# Altium PCB SolderingStation_V6.PcbDoc (part 1 of 2)
Units mm, origin at the board's own origin, x right, y up, seen from the top; angles counter-clockwise.
Board outline 138.15 x 60.81 mm, 2 copper layers (Top Layer, Bottom Layer), stack 1.671 mm thick; 179 components, 105 nets, 526 pads, 400 vias.
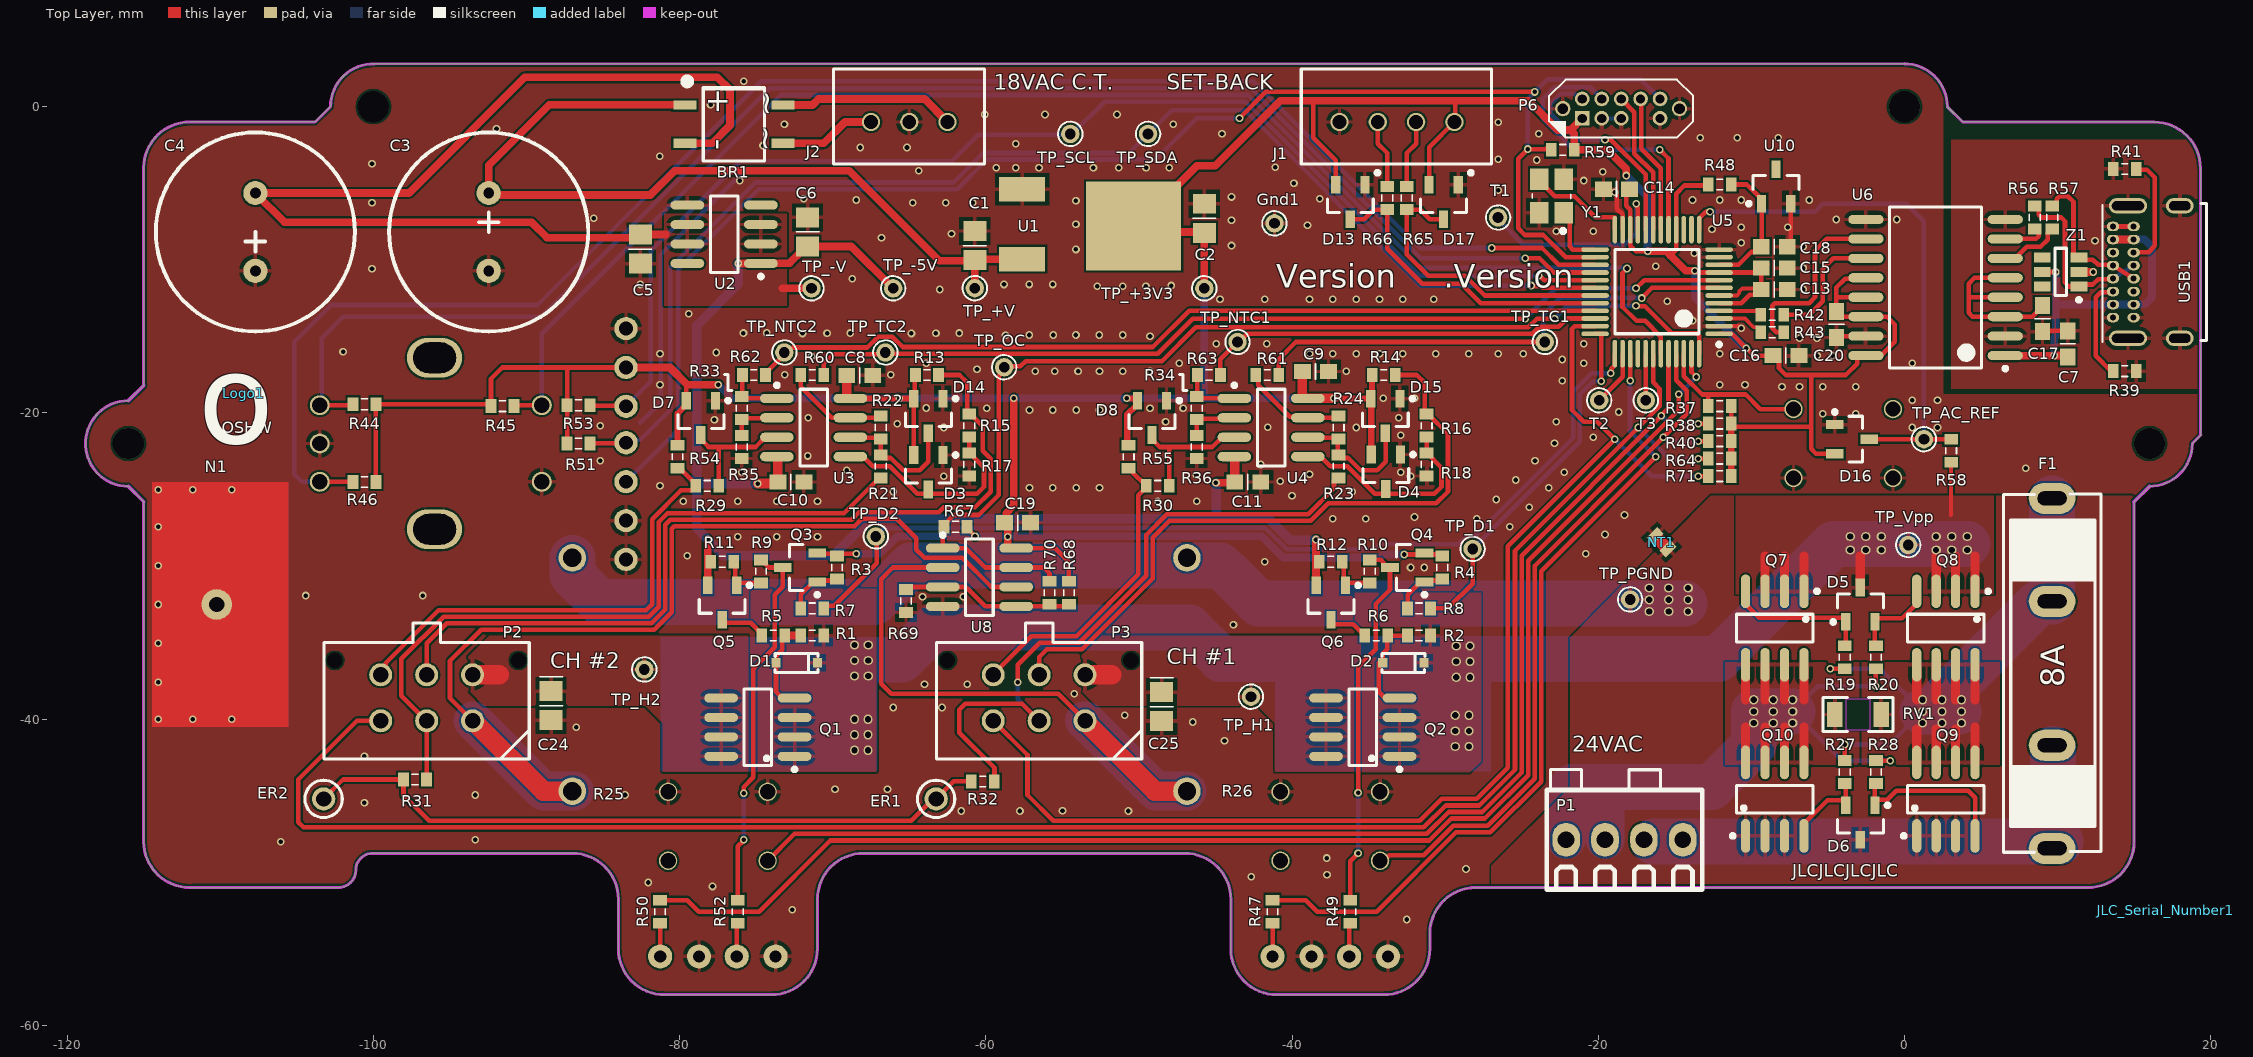
[diagram p0: Top Layer view]
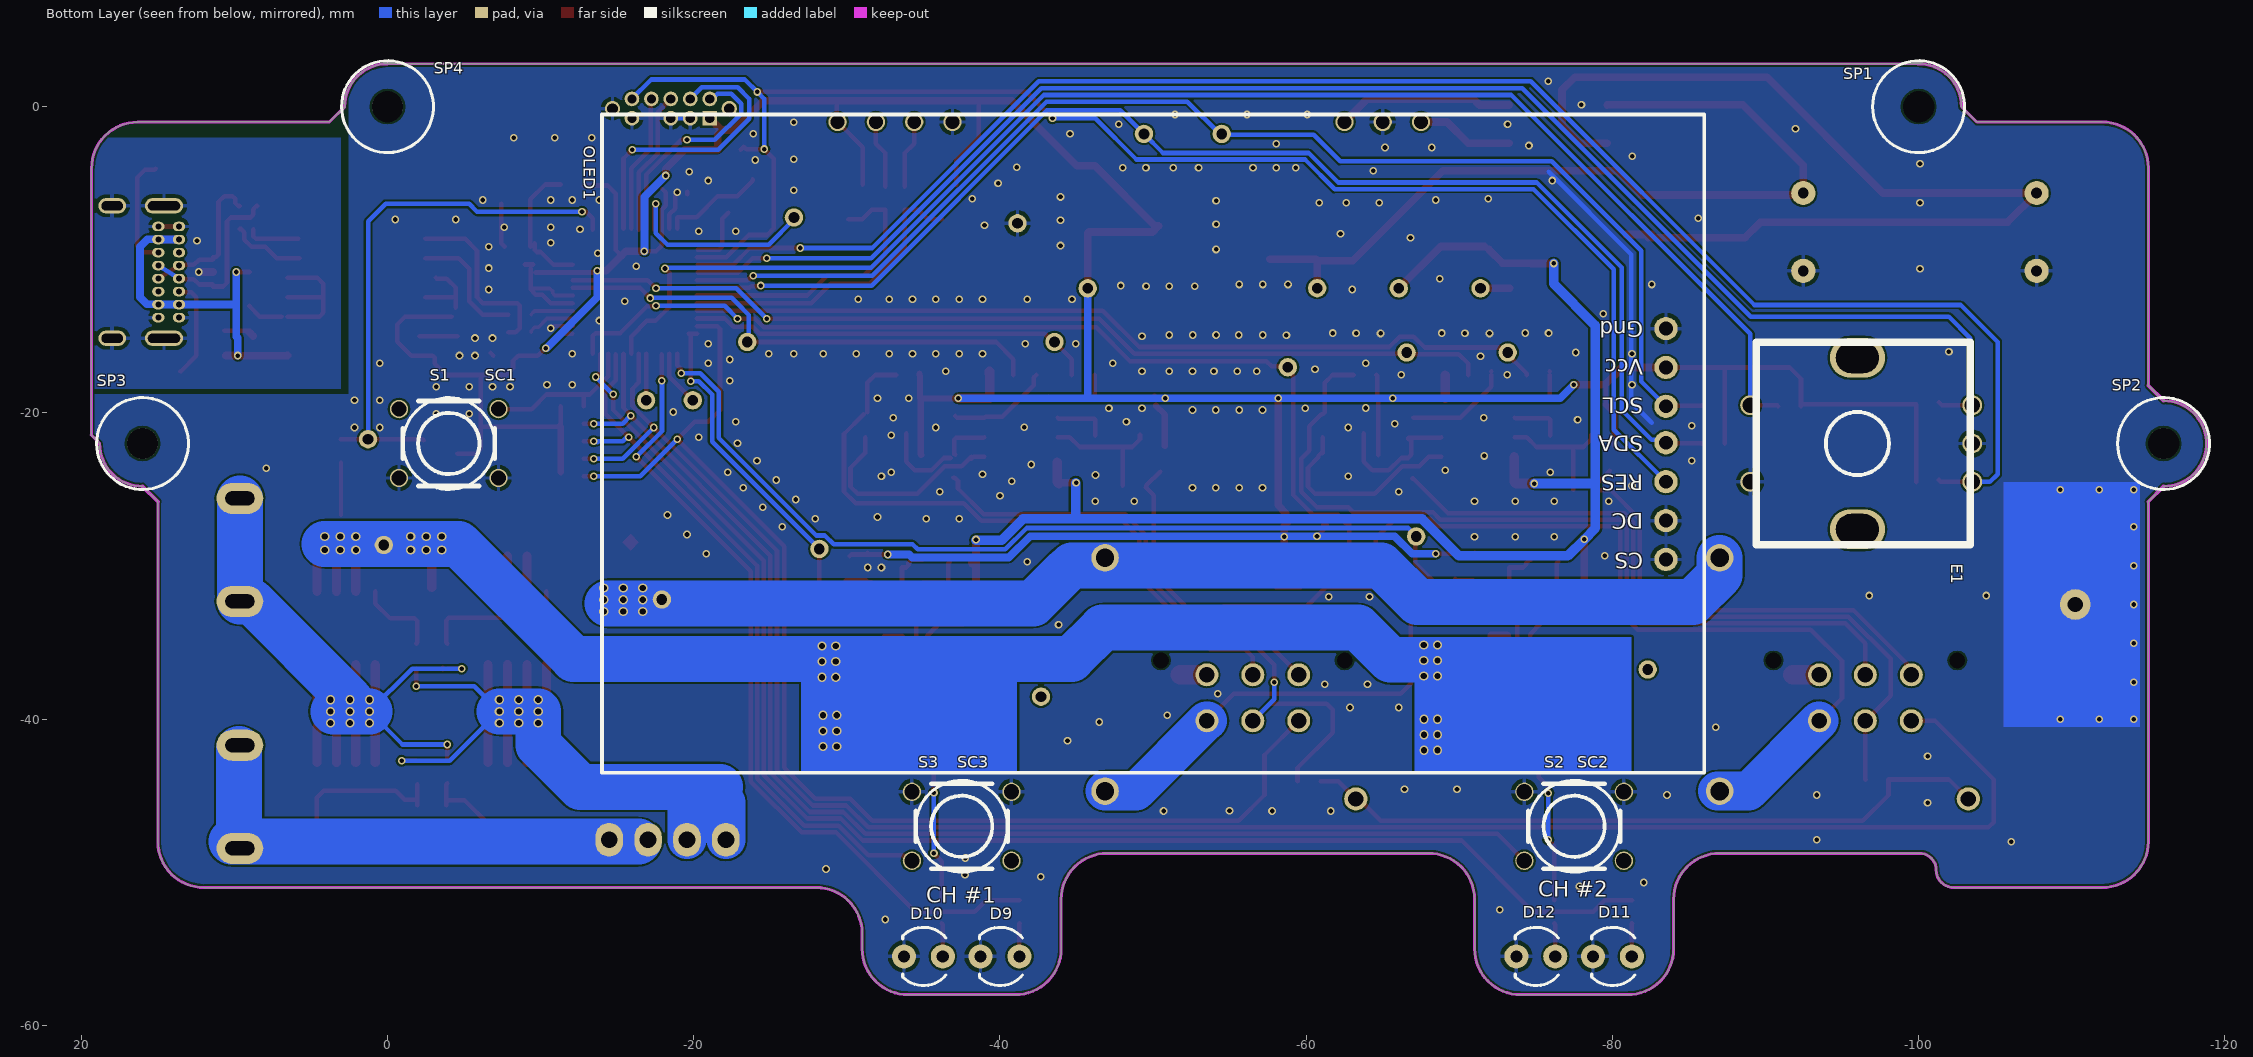
[diagram p1: Bottom Layer view, seen from below]

## Layer stack, top to bottom
Top Solder: solder mask 0.0102, Solder Resist, Dk 3.5
Top Layer: signal copper 0.0356
Dielectric 1: dielectric 1.6, FR-4, Dk 4.8
Bottom Layer: signal copper 0.0356
Bottom Solder: solder mask 0.0102, Solder Resist, Dk 3.5

## Board outline
-112,-51 -102.286,-51 ccw(c-102.286,-49.862) -101.148,-49.862 cw(c-100.048,-49.862) -100.048,-48.762 -100.048,-48.765 -87,-48.765 cw(c-87,-51.765) -84,-51.765 -84,-55 ccw(c-81,-55) -81,-58 -74,-58 ccw(c-74,-55) -71,-55 -71,-51.765 cw(c-68,-51.765) -68,-48.765 -47,-48.765 cw(c-47,-51.765) -44,-51.765 -44,-55 ccw(c-41,-55) -41,-58 -34,-58 ccw(c-34,-55) -31,-55 -31,-54 cw(c-28,-54) -28,-51 12,-51 ccw(c12,-48) 15,-48 15,-25.8 16,-24.8 ccw(c16,-22) 18.8,-22 19.355,-21.445 19.34,-21.445 19.34,-4.013 19.329,-4.013 ccw(c16.329,-4.013) 16.329,-1.013 16.329,-1 3.8,-1 2.8,0 ccw(c0,0) 0,2.8 0,2.814 -99.926,2.799 ccw(c-100,0) -102.8,0 -103.8,-1 -112,-1 ccw(c-112,-4) -115,-4 -115,-18.2 -116,-19.2 ccw(c-116,-22) -116,-24.8 -115,-25.8 -115,-48 ccw(c-112,-48)

## Design rules (kind name [scope] priority, off if disabled: settings)
Clearance [All] p1: gap=0.127 ignorepadtopadclearanceinfootprint=FALSE
DiffPairsRouting [All] p1: maxlimit=0.254 minlimit=0.254 mostfreqgap=0.254 toplayer_minwidth=0.254 toplayer_maxwidth=0.381 toplayer_prefwidth=0.381 bottomlayer_minwidth=0.254 bottomlayer_maxwidth=0.381 bottomlayer_prefwidth=0.381 maxuncoupledlength=12.7
HoleSize [All] p1: absolutevalues=TRUE maxlimit=3.1 minlimit=0.025 maxpercent=80.000 minpercent=20.000
MinimumSolderMaskSliver [All] p1 off: minsoldermaskwidth=0.254
PolygonConnect PolygonConnect_Via [IsPolygon vs IsVia] p1: connectstyle=Direct reliefconductorwidth=0.254 reliefentries=4 polygonreliefangle="90 Angle" airgapwidth=0.254
PolygonConnect [All] p2: connectstyle=Relief reliefconductorwidth=0.254 reliefentries=4 polygonreliefangle="90 Angle" airgapwidth=0.254
RoomDefinition SolderingStation_Control [InComponentClass('SolderingStation_Control')] p1: confinementstyle=ConfineIn formatcopy=TRUE lockcomponents=FALSE outline -121.043,-59.006 24,-59.006 24,5 -121.043,5
RoomDefinition SolderingStation_Power [InComponentClass('SolderingStation_Power')] p2: confinementstyle=ConfineIn formatcopy=TRUE lockcomponents=FALSE outline -121,-59 21,-59 21,5 -121,5
RoomDefinition SolderingStation_Processor [InComponentClass('SolderingStation_Processor')] p3: confinementstyle=ConfineIn formatcopy=TRUE lockcomponents=FALSE outline -121,-59 24,-59 24,5 -121,5
RoutingVias [All] p1: holewidth=0.3 width=0.5 viastyle="Through Hole" minholewidth=0 minwidth=0.5 maxholewidth=0.711 maxwidth=1.27
SilkToSilkClearance [All] p1 off: silktosilkclearance=0.254
SilkToSolderMaskClearance [IsPad] p1 off: minsilkscreentomaskgap=0.254 clearancetoexposedcopper=TRUE
SolderMaskExpansion SolderMaskExpansion_Via [IsVia] p1: expansion=0.102 istentingtop=TRUE
SolderMaskExpansion [All] p2: expansion=0.102 istentingtop=FALSE
Width [All] p1: maxlimit=4 minlimit=0.254 preferedwidth=0.254
25 further rules are at their usual default settings.

## Classes and differential pairs
component class SolderingStation_Power: BR1 C1 C2 C3 C4 C5 C6 D5 D6 D16 F1 J2 N1 NT1 P1 Q7 Q8 Q9 Q10 R19 R20 R27 R28 R58 RV1 SP1 SP2 SP3 SP4 TP_+3V3 TP_+V TP_-5V TP_-V TP_AC_REF TP_PGND TP_Vpp U1 U2
component class SolderingStation_Processor: C7 C13 C14 C15 C16 C17 C18 C20 D9 D11 D13 D17 E1 Gnd1 J1 JLC_Serial_Number1 Logo1 OLED1 P6 R37 R38 R39 R40 R41 R42 R43 R44 R45 R46 R47 R48 R50 R51 R53 R56 R57 R59 R65 R66 S1 S2 S3 SC1 SC2 SC3 T1 T2 T3 TP_SCL TP_SDA U5 U6 U10 USB1 Y1 Z1
component class SolderingStation_Control: C8 C9 C10 C11 C19 C24 C25 D1 D2 D3 D4 D7 D8 D10 D12 D14 D15 ER1 ER2 P2 P3 Q1 Q2 Q3 Q4 Q5 Q6 R1 R2 R3 R4 R5 R6 R7 R8 R9 R10 R11 R12 R13 R14 R15 R16 R17 R18 R21 R22 R23 R24 R25 R26 R29 R30 R31 R32 R33 R34 R35 R36 R49 R52 R54 R55 R60 R61 R62 R63 R64 R67 R68 R69 R70 R71 TP_D1 TP_D2 TP_H1 TP_H2 TP_NTC1 TP_NTC2 TP_OC TP_TC1 TP_TC2 U3 U4 U8

## Components (designator, comment, footprint, x,y, rotation, side; value= is the part's Value field where it differs from the comment)
BR1 "MB1S" MB1S -76.454,-1.143 r0 top
C1 "100nF" CCNP2012-0805 -60.718,-9.07 r270 top
C2 "10uF" CCNP2012-0805 -45.732,-7.292 r270 top
C3 "470uF/50V" RB5/13X21MM -92.468,-8.181 r270 top
C4 "470uF/50V" RB5/13X21MM -107.708,-8.181 r90 top
C5 "2.2uF" CCNP2012-0805 -82.562,-9.299 r90 top
C6 "10uF" CCNP2012-0805 -71.64,-8.181 r270 top
C7 "100nF" CCNP1608-0603 10.668,-15.494 r270 top
C8 "100nF" CCNP1608-0603 -68.237,-17.551 r0 top
C9 "100nF" CCNP1608-0603 -38.468,-17.297 r0 top
C10 "100nF" CCNP1608-0603 -72.733,-24.511 r0 top
C11 "100nF" CCNP1608-0603 -42.893,-24.511 r0 top
C13 "2.2uF" CCNP1608-0603 -8.509,-11.938 r180 top
C14 "100nF" CCNP1608-0603 -18.808,-5.387 r0 top
C15 "100nF" CCNP1608-0603 -8.509,-10.541 r180 top
C16 "100nF" CCNP1608-0603 -7.747,-16.256 r180 top
C17 "100nF" CCNP1608-0603 9.017,-13.843 r90 top
C18 "100nF" CCNP1608-0603 -8.509,-9.144 r180 top
C19 "100nF" CCNP1608-0603 -57.924,-27.18 r0 top
C20 "100nF" CCNP1608-0603 -4.445,-14.224 r90 top
C24 "1uF" CC2012-0805 -88.392,-39.116 r270 top
C25 "1uF" CC2012-0805 -48.514,-39.182 r270 top
D1 "BZT52C12S-7-F" SOD-323 -72.352,-36.322 r0 top
D2 "BZT52C12S-7-F" SOD-323 -32.728,-36.322 r0 top
D3 "BAV199LT1G" SOT23_N -63.754,-23.876 r90 top
D4 "BAV199LT1G" SOT23_N -33.876,-23.843 r90 top
D5 "DZ23C12" SOT23_N -2.883,-32.528 r270 top
D6 "AZ23C7V5" SOT23_N -2.883,-46.752 r90 top
D7 "BAV199LT1G" SOT23_N -78.613,-20.32 r90 top
D8 "BAV199LT1G" SOT23_N -49.149,-20.32 r90 top
D9 "LED" "LED3MM-RED - 10MM PROUD" -40,-55.5 r0 bottom locked
D10 "LED" "LED3MM-GREEN - 10MM PROUD" -35,-55.5 r0 bottom locked
D11 "LED" "LED3MM-RED - 10MM PROUD" -80,-55.5 r0 bottom locked
D12 "LED" "LED3MM-GREEN - 10MM PROUD" -75,-55.5 r0 bottom locked
D13 "BAV199LT1G" SOT23_N -36.195,-6.223 r90 top
D14 "BAV199LT1G" SOT23_N -63.754,-20.193 r90 top
D15 "BAV199LT1G" SOT23_N -33.909,-20.193 r90 top
D16 "BAT54S" SOT23_N -3.429,-21.717 r180 top
D17 "BAV199LT1G" SOT23_N -30.099,-6.223 r90 top
E1 "PEC12R-4217F" "ROTARYENCODER - PEC12R" -96,-22 r90 bottom locked
ER1 "Gnd" "PCBPIN - 1mm" -63.246,-45.212 r0 top
ER2 "Gnd" "PCBPIN - 1mm" -103.251,-45.212 r0 top
F1 "Bell FC-211-22" FUSE_CLIP_5x20 9.64,-37.01 r90 top
Gnd1 "Gnd" "PCBPIN - 0.7mm" -41.148,-7.62 r90 top
J1 "JST XH Connector, 4-Pin" JST-B4B-XH-AX -33.147,-1 r180 top locked
J2 "JST XH Connector, 3-Pin" JST-B3B-XH-AX -65,-1 r180 top
JLC_Serial_Number1 "JLC_Serial_Number" JLC_Serial_Number 17.056,-52.476 r90 top
Logo1 "OSHW Logo" OSHW -108.47,-18.722 r0 top
N1 "Nalclip-Edge" Nalclip-Edge -110.236,-32.512 r270 top locked
NT1 "NetTie" NetTie2 -15.875,-28.448 r135 top net-tie
OLED1 "OLED_Display" "OLED_Display_128x64_2.4inch - no mounting holes" -50,-22 r0 bottom locked
P1 "Terminal4_BUCHANAN" TYCO-282834-4 -18.288,-47.879 r0 top
P2 "MOLEX-43045-0612" MOLEX-43045-0612 -96.52,-38.608 r0 top locked
P3 "MOLEX-43045-0612" MOLEX-43045-0612 -56.515,-38.608 r0 top locked
P6 "SWD Connector 2x5-Pin" SWD-2x5-Jig-Header -21.044,-0.762 r0 top
Q1 "FDS4675" SO-8_N -74.892,-40.529 r90 top
Q2 "FDS4675" SO-8_N -35.38,-40.529 r90 top
Q3 "MMBT3906LT1G" SOT23_N -72.136,-30.099 r0 top
Q4 "MMBT3906LT1G" SOT23_N -32.474,-30.099 r0 top
Q5 "MMBT3904LT1G" SOT23_N -77.216,-32.385 r90 top
Q6 "MMBT3904LT1G" SOT23_N -37.465,-32.385 r90 top
Q7 "FDS4675" SO-8_N -8.471,-34.052 r180 top
Q8 "FDS4675" SO-8_N 2.705,-34.052 r180 top
Q9 "FDS4672" SO-8_N 2.705,-45.228 r0 top
Q10 "FDS4672" SO-8_N -8.471,-45.228 r0 top
R1 "27K" CR1608-0603_N -71.336,-34.544 r0 top
R2 "27K" CR1608-0603_N -31.712,-34.544 r0 top
R3 "15K" CR1608-0603_N -69.723,-30.099 r270 top
R4 "15K" CR1608-0603_N -30.188,-30.099 r270 top
R5 "7k5" CR1608-0603_N -73.876,-34.544 r0 top
R6 "7k5" CR1608-0603_N -34.506,-34.544 r0 top
R7 "39K" CR1608-0603_N -71.336,-32.766 r0 top
R8 "39K" CR1608-0603_N -31.712,-32.766 r0 top
R9 "43K" CR1608-0603_N -74.676,-30.353 r90 top
R10 "43K" CR1608-0603_N -34.925,-30.353 r90 top
R11 "30K" CR1608-0603_N -77.216,-29.718 r180 top
R12 "30K" CR1608-0603_N -37.465,-29.718 r180 top
R13 "100K" CR1608-0603_N -63.843,-17.526 r180 top
R14 "100K" CR1608-0603_N -34.003,-17.526 r180 top
R15 "1K 1%" CR1608-0603_N -61.087,-20.828 r90 top
R16 "1K 1%" CR1608-0603_N -31.209,-20.828 r90 top
R17 "100K 1%" CR1608-0603_N -61.087,-23.368 r90 top
R18 "100K 1%" CR1608-0603_N -31.209,-23.368 r90 top
R19 "4K3" CR1608-0603_N -3.899,-35.957 r90 top
R20 "4K3" CR1608-0603_N -1.867,-35.957 r90 top
R21 "1K 1%" CR1608-0603_N -66.865,-23.495 r90 top
R22 "100K 1%" CR1608-0603_N -66.865,-20.955 r90 top
R23 "1K 1%" CR1608-0603_N -36.957,-23.495 r90 top
R24 "100K 1%" CR1608-0603_N -36.957,-20.955 r90 top
R25 "OAR3-R050FI" OAR3-R050FI -87.007,-37.084 r270 top
R26 "OAR3-R050FI" OAR3-R050FI -46.863,-37.084 r270 top
R27 "4K3" CR1608-0603_N -3.899,-43.45 r90 top
R28 "4K3" CR1608-0603_N -1.867,-43.45 r90 top
R29 "10K" CR1608-0603_N -78.194,-24.765 r180 top
R30 "10K" CR1608-0603_N -48.768,-24.765 r180 top
R31 "100K" CR1608-0603_N -97.282,-43.942 r0 top
R32 "100K" CR1608-0603_N -60.198,-44.069 r0 top
R33 "10K" CR1608-0603_N -75.946,-19.685 r90 top
R34 "10K" CR1608-0603_N -46.228,-19.685 r90 top
R35 "DNP" CR1608-0603_N -75.946,-22.225 r90 top
R36 "DNP" CR1608-0603_N -46.228,-22.225 r90 top
R37 "10K" CR1608-0603_N -12.065,-19.558 r0 top
R38 "10K" CR1608-0603_N -12.065,-20.701 r0 top
R39 "5k1" CR1608-0603_N 14.389,-17.272 r0 top
R40 "10K" CR1608-0603_N -12.065,-21.844 r0 top
R41 "5k1" CR1608-0603_N 14.389,-4.064 r180 top
R42 "33R" CR1608-0603_N -8.636,-13.589 r180 top
R43 "33R" CR1608-0603_N -8.636,-14.732 r180 top
R44 "10K" CR1608-0603_N -100.584,-19.431 r0 top
R45 "10K" CR1608-0603_N -91.567,-19.558 r180 top
R46 "10K" CR1608-0603_N -100.584,-24.511 r0 top
R47 "470R" CR1608-0603_N -41.275,-52.578 r270 top
R48 "1K" CR1608-0603_N -12.065,-5.08 r0 top
R49 "470R" CR1608-0603_N -36.195,-52.578 r90 top
R50 "470R" CR1608-0603_N -81.28,-52.578 r90 top
R51 "4k7" CR1608-0603_N -86.6,-22 r180 top
R52 "470R" CR1608-0603_N -76.2,-52.578 r90 top
R53 "4k7" CR1608-0603_N -86.6,-19.5 r180 top
R54 "10K" CR1608-0603_N -80.137,-22.86 r90 top
R55 "10K" CR1608-0603_N -50.673,-22.86 r90 top
R56 "33R" CR1608-0603_N 8.509,-7.239 r90 top
R57 "33R" CR1608-0603_N 9.652,-7.239 r90 top
R58 "15K" CR1608-0603_N 3.048,-22.479 r90 top
R59 "10K" CR1608-0603_N -22.314,-2.819 r0 top
R60 "0R" CR1608-0603_N -71.336,-17.526 r180 top
R61 "0R" CR1608-0603_N -41.618,-17.526 r180 top
R62 "0R" CR1608-0603_N -75.146,-17.526 r180 top
R63 "0R" CR1608-0603_N -45.428,-17.526 r180 top
R64 "10K" CR1608-0603_N -12.065,-22.987 r0 top
R65 "1K" CR1608-0603_N -32.512,-5.969 r90 top
R66 "1K" CR1608-0603_N -33.782,-5.969 r90 top
R67 "10K" CR1608-0603_N -61.976,-27.432 r0 top
R68 "10K 1%" CR1608-0603_N -54.572,-31.75 r90 top
R69 "1K 1%" CR1608-0603_N -65.214,-32.286 r90 top
R70 "100K" CR1608-0603_N -55.842,-31.75 r90 top
R71 "10K" CR1608-0603_N -12.065,-24.13 r0 top
RV1 "V33MLA1206NHAUTO" VR3216-1206 -3.035,-39.7 r180 top
S1 "SW_PB-FSM4JAH" SW_MIN_PB-B3F1052 -4,-22 r180 bottom locked
S2 "SW_PB-FSM4JAH" SW_MIN_PB-B3F1052 -77.5,-47 r0 bottom locked
S3 "SW_PB-FSM4JAH" SW_MIN_PB-B3F1052 -37.5,-47 r0 bottom locked
SC1 "B32-2010" SW-CAP-B32-2010 -4,-22 r180 bottom locked
SC2 "B32-2010" SW-CAP-B32-2010 -77.5,-47 r180 bottom locked
SC3 "B32-2010" SW-CAP-B32-2010 -37.5,-47 r180 bottom locked
SP1 "6MM Spacer" SPACER-6MM#1 -100,0 r180 bottom locked
SP2 "6MM Spacer" SPACER-6MM#2 -116,-22 r180 bottom locked
SP3 "6MM Spacer" SPACER-6MM#2 16,-22 r180 bottom locked
SP4 "6MM Spacer" SPACER-6MM#2 0,0 r180 bottom locked
T1 "Vdd" "PCBPIN - 0.7mm" -26.543,-7.239 r90 top
T2 "Vdd" "PCBPIN - 0.7mm" -19.939,-19.177 r90 top
T3 "Vdd" "PCBPIN - 0.7mm" -16.891,-19.177 r90 top
TP_+3V3 "Vdd" "PCBPIN - 0.7mm" -45.732,-11.864 r90 top
TP_+V "Vdd" "PCBPIN - 0.7mm" -60.718,-11.852 r90 top
TP_-5V "Vdd" "PCBPIN - 0.7mm" -66.052,-11.864 r90 top
TP_-V "Vdd" "PCBPIN - 0.7mm" -71.386,-11.864 r90 top
TP_AC_REF "Vdd" "PCBPIN - 0.7mm" 1.27,-21.717 r90 top
TP_D1 "Vdd" "PCBPIN - 0.7mm" -28.206,-28.882 r0 top
TP_D2 "Vdd" "PCBPIN - 0.7mm" -67.183,-28.067 r0 top
TP_H1 "Vdd" "PCBPIN - 0.7mm" -42.684,-38.534 r0 top
TP_H2 "Vdd" "PCBPIN - 0.7mm" -82.308,-36.756 r0 top
TP_NTC1 "Vdd" "PCBPIN - 0.7mm" -43.561,-15.367 r0 top
TP_NTC2 "Vdd" "PCBPIN - 0.7mm" -73.164,-16.055 r0 top
TP_OC "Vdd" "PCBPIN - 0.7mm" -58.801,-17.018 r0 top
TP_PGND "Vdd" "PCBPIN - 0.7mm" -17.919,-32.184 r90 top
TP_SCL "SCL" "PCBPIN - 0.7mm" -54.483,-1.778 r90 top
TP_SDA "SDA" "PCBPIN - 0.7mm" -49.403,-1.778 r90 top
TP_TC1 "Vdd" "PCBPIN - 0.7mm" -23.495,-15.367 r0 top
TP_TC2 "Vdd" "PCBPIN - 0.7mm" -66.56,-16.055 r0 top
TP_Vpp "Vdd" "PCBPIN - 0.7mm" 0.242,-28.628 r90 top
U1 "NCP1117DT33T5G" TO-252 -53.987,-7.673 r180 top
U2 "MC79L05ACD" SOIC127P600-8N#1 -77.089,-8.333 r90 top
U3 "TLV2186" SOIC127P600-8N#1 -71.247,-20.955 r270 top
U4 "TLV2186" SOIC127P600-8N#2 -41.369,-20.955 r0 top
U5 "MK20DX128VLF5" TSQFP50P900X900-48N -16.16,-12.082 r90 top locked
U6 "ADuM4160BRIZ" SOIC127P1030-16N 2.032,-11.811 r180 top
U8 "LM393ADR" SOIC127P600-8N#2 -60.414,-30.734 r0 top
U10 "LM4040BIM3-3.0/NOPB" SOT23_N -8.382,-5.207 r270 top
USB1 "USB4085-GF-A" USB4085-GF-A 15.8,-10.8 r180 top locked
Y1 "16 MHz" Crystal_SMD_3.2x2.5 -23.06,-5.832 r90 top
Z1 "CM1293A-04SO" SOT457_N 10.198,-10.795 r180 top locked

## Footprints (in the part's own frame and the unit in brackets; to place one, negate y for a bottom-side part, rotate by r counter-clockwise, add the part's x,y. Pads: shape width x height; smd on the part's side, far side on the other; paste and mask are expansions set on the pad)
CC2012-0805 [mm]
  rect 1.3x1.5 smd: 1(-0.95,0) 2(0.95,0)
  silkscreen extent -1.87,-0.75 0,0.75, body extent -1,-0.62 1,0.63, height 0.78
CCNP1608-0603 [mm]
  rect 1.1x1 smd: 1(-0.85,0) 2(0.85,0)
  silkscreen extent 0,-0.5 0,0.5, body extent -0.8,-0.4 0.8,0.4, height 0.3
CCNP2012-0805 [mm]
  rect 1.3x1.5 smd: 1(-0.95,0) 2(0.95,0)
  silkscreen extent 0,-0.75 0,0.75, body extent -1,-0.62 1,0.63, height 0.78
CR1608-0603_N [mm]
  rect 0.7x0.9 smd: 1(-0.75,0) 2(0.75,0)
  silkscreen extent -0.2,-0.35 0.2,0.35, body extent -0.85,-0.4 0.85,0.4, height 0.56
Crystal_SMD_3.2x2.5 [mm] "Crystal SMT low profile 3.2 x 2.5 SMD"
  rect 1.4x1.2 smd: 1(-1.1,-0.8) 2(1.1,-0.8) 3(1.1,0.8) 4(-1.1,0.8)
  silkscreen extent -2.39,-1.25 0.15,1.25, body extent -1.55,-1.24 1.65,1.26, height 0.7
FUSE_CLIP_5x20 [mil] "Fuse clip for 5x20 mm fuse PCB mounted"
  oval 80x120 hole 36 slot 75 at 90 deg: 1(-450,0) 1a(-185,0) 2(450,0) 2a(185,0)
  silkscreen extent -460,-126 461,125, body extent -460,-125 460,125, height 344
JLC_Serial_Number [mm] "JLC Serial Number"
JST-B3B-XH-AX [mm] "JST 3-pin connector PCB mount"
  round 1.2 hole 0.9: 1(-2.5,0) 2(0,0) 3(2.5,0)
  silkscreen extent -4.92,-3.45 4.95,2.75, body extent -4.95,-3.37 4.95,2.72, height 7
JST-B4B-XH-AX [mm] "JST 4-pin connector PCB mount"
  round 1.2 hole 0.9: 1(-3.75,0) 2(-1.25,0) 3(1.25,0) 4(3.75,0)
  silkscreen extent -6.17,-3.45 6.25,2.75, body extent -6.2,-3.37 6.2,2.72, height 7
"LED3MM-GREEN - 10MM PROUD" [mil] "LED 3mm through-hole"
  round 62 hole 31.5: A(-50,0) K(50,0)
  silkscreen extent -58,-75 53,75, body extent -75,-75 63,75, height 413
"LED3MM-RED - 10MM PROUD" [mil] "LED 3mm through-hole"
  round 62 hole 31.5: A(-50,0) K(50,0)
  silkscreen extent -58,-75 53,75, body extent -75,-75 63,75, height 413
MB1S [mm] "Bridge Rectifier Diode, Single Phase, 100 V, 800 mA, SOIC, 1.1 V, 4 Pins"
  rect 1.5x0.6 smd: 1(-3.2,1.25) 2(-3.2,-1.25) 3(3.2,-1.25) 4(3.2,1.25)
  silkscreen extent -3.25,-2.4 2,2.99, body extent -3.5,-2.35 3.5,2.35, height 2.4
MOLEX-43045-0612 [mm] "Wire-To-Board Connector, With Polarizing Peg, 3 mm, 6 Contacts, Header, Micro-Fit 3.0 43045 Series"
  round 0.8 hole 1.02: 0(-6,2.44) 0(6,2.44)
  round 1.5 hole 1.02: 1(3,-1.5) 2(0,-1.5) 3(-3,-1.5) 4(3,1.5) 5(0,1.5) 6(-3,1.5)
  silkscreen extent -6.7,-4 6.7,4.9, body extent -6.57,-3.94 6.58,4.83, height 9.95
Nalclip-Edge [mm] "Nalclip on edge of PCB"
  round 2 hole 1: 1(0,0)
  Top Layer region: -8,-4.21 8,-4.21 8,4.705 -8,4.705
  Bottom Layer region: -8,-4.21 8,-4.21 8,4.705 -8,4.705
  body extent -6.4,-5.06 6.4,4.03, height 1.07
NetTie2 [mm] "Net Tie (Short)"
  rect 0.6x1 smd mask+0.102: 1(-0.6,0) 2(0.6,0)
  Top Layer region: -0.4,-0.4 0.4,-0.4 0.4,0.4 -0.4,0.4
OAR3-R050FI [mm] "Current Sense Resistor, 0.05 ohm, OAR Series, 3 W, Metal Strip, Radial Leaded, ± 1%"
  round 1.8 hole 1.2: 1(-7.62,0) 2(7.62,0)
  body extent -8.25,-0.82 8.23,0.83, height 24.21
"OLED_Display_128x64_2.4inch - no mounting holes" [mm] "Small OLED Display"
  round 1.524 hole 0.9: 1(-33.5,7.572) 2(-33.5,5.032) 3(-33.5,2.492) 4(-33.5,-0.048) 5(-33.5,-2.428) 6(-33.5,-4.968) 7(-33.5,-7.508)
  silkscreen extent -36,-21.5 36,21.5, body extent -35.99,-21.45 36.01,21.55, height 6.4
OSHW [mm] "OSHW Logo"
"PCBPIN - 0.7mm" [mm]
  round 1.2 hole 0.7: 1(0,0)
  silkscreen extent -0.8,-0.8 0.8,0.8
"PCBPIN - 1mm" [mil]
  round 60 hole 39.37: 1(0,0)
  silkscreen extent -48,-48 48,48, body extent -22,-22 22,22, height 205
RB5/13X21MM [mil]
  round 62 hole 28: 1(-100,0) 2(100,0)
  silkscreen extent -256,-256 256,256, body extent -256,-256 256,256, height 827
"ROTARYENCODER - PEC12R" [mm] "Bourns Rotary Encoder - PEC12R-4217F (17.5 mm)"
  oval 2.6x3.6 hole 2 slot 2.8 at 90 deg: 0(-5.6,0) 0(5.6,0)
  round 1.3 hole 1: A(-2.5,-7.5) B(2.5,-7.5) C(0,-7.5) D(-2.5,7) E(2.5,7)
  silkscreen extent -6.6,-7.37 6.6,6.6, body extent -7.5,-7.5 7.5,7.5, height 17.85
SO-8_N [mm] "8-Pin Small Outline Integrated Circuit 1.27 mm Pitch, IPC Medium Density"
  oval 0.6x2.2 smd: 1(-1.905,-2.4) 2(-0.635,-2.4) 3(0.635,-2.4) 4(1.905,-2.4) 5(1.905,2.4) 6(0.635,2.4) 7(-0.635,2.4) 8(-1.905,2.4)
  silkscreen extent -2.88,-2.53 2.5,0.9, body extent -2.5,-3.1 2.5,3.1, height 1.75
SOD-323 [mm]
  rect 0.6x0.6 smd: A(-1.35,0) K(1.35,0)
  silkscreen extent -1.41,-0.63 1.4,0.6, body extent -1.35,-0.63 1.35,0.62, height 1.1
SOIC127P600-8N#1 [mm] "SOIC, 8-Leads, Body 4.9x3.9mm, Pitch 1.27mm, IPC Medium Density"
  oval 0.6x2.2 smd: 1(-1.905,-2.4) 2(-0.635,-2.4) 3(0.635,-2.4) 4(1.905,-2.4) 5(1.905,2.4) 6(0.635,2.4) 7(-0.635,2.4) 8(-1.905,2.4)
  silkscreen extent -2.88,-2.53 2.5,0.9, body extent -2.5,-3.06 2.5,3.14, height 1.75
SOIC127P600-8N#2 [mm] "SOIC, 8-Leads, Body 4.9x3.9mm, Pitch 1.27mm, IPC Medium Density"
  oval 2.2x0.6 smd: 1(-2.4,1.905) 2(-2.4,0.635) 3(-2.4,-0.635) 4(-2.4,-1.905) 5(2.4,-1.905) 6(2.4,-0.635) 7(2.4,0.635) 8(2.4,1.905)
  silkscreen extent -2.52,-2.5 0.9,2.88, body extent -3.06,-2.5 3.14,2.5, height 1.75
SOIC127P1030-16N [mm] "SOIC, 16-Leads, Body 10.3x7.5mm, Pitch 1.27mm, IPC Medium Density"
  oval 2.3x0.6 smd: 1(-4.55,4.445) 2(-4.55,3.175) 3(-4.55,1.905) 4(-4.55,0.635) 5(-4.55,-0.635) 6(-4.55,-1.905) 7(-4.55,-3.175) 8(-4.55,-4.445) 9(4.55,-4.445) 10(4.55,-3.175) 11(4.55,-1.905) 12(4.55,-0.635) 13(4.55,0.635) 14(4.55,1.905) 15(4.55,3.175) 16(4.55,4.445)
  silkscreen extent -4.67,-5.25 3,5.42, body extent -5.31,-5.25 5.32,5.25, height 2.62
SOT23_N [mm] "SOT23, 3-Leads, Body 2.9x1.3mm, Pitch 0.95mm, Lead Span 2.3mm - IPC Medium Density"
  rect 1.15x0.6 smd: 1(1.125,-0.95) 2(1.125,0.95) 3(-1.125,0)
  silkscreen extent -0.7,-1.9 1.25,1.5, body extent -1.25,-1.5 1.25,1.5, height 1.05
SOT457_N [mm] "SOT23, 6-Leads, Body 2.9x1.5mm, Pitch 0.95mm, Lead Span 2.8mm, IPC Medium Density"
  rect 1.1x0.65 smd: 1(-1.2,0.95) 2(-1.2,0) 3(-1.2,-0.95) 4(1.2,-0.95) 5(1.2,0) 6(1.2,0.95)
  silkscreen extent -1.33,-1.55 0.38,1.95, body extent -1.34,-1.5 1.5,1.4, height 1.21
SPACER-6MM#1 [mm]
  round 2 hole 2.05: 3(0,0)
  silkscreen extent -3,-3 3,3, body extent -3,-3 3,3, height 6
SPACER-6MM#2 [mm]
  round 2 hole 2.05: 0(0,0)
  silkscreen extent -3,-3 3,3, body extent -3,-3 3,3, height 6
SW-CAP-B32-2010 [mm] "Switch cap for small push-button switch 6mm dia."
  silkscreen extent -3,-3 3,3, body extent -3,-3 3,3, height 10
SW_MIN_PB-B3F1052 [mm] "Miniature PCB Push Button projected plunger"
  round 1.2 hole 1: 1(3.25,-2.25) 1b(-3.25,-2.25) 2(3.25,2.25) 2b(-3.25,2.25)
  silkscreen extent -3,-2.77 3,2.78, body extent -3.85,-3 3.85,3, height 6.7
SWD-2x5-Jig-Header [mm] "Connector; SWD; 2x5 Position"
  round 1 hole 0.7: 0(-1.27,0.635) 0(6.35,0.635)
  rect 0.96x0.96 hole 0.6: 1(0,0)
  round 0.96 hole 0.6: 2(0,1.27) 3(1.27,0) 4(1.27,1.27) 5(2.54,0) 6(2.54,1.27) 8(3.81,1.27) 9(5.08,0) 10(5.08,1.27)
  silkscreen extent -2.16,-1.26 7.24,2.53, body extent -0.63,-1.09 5.72,2.31, height 4.5
TO-252 [mm] "TO-252 Package"
  rect 3x1.6 smd: 1(3.64,-2.285) 3(3.64,2.285)
  rect 6.2x5.8 smd: 4(-3.64,0.127)
  body extent -5.71,-3.14 4.23,3.4, height 2.29
TSQFP50P900X900-48N [mm] "Thin QFP, 48-Leads, Body 7x7mm, Pitch 0.5mm, IPC Medium Density"
  oval 0.3x1.8 smd: 1(-2.75,-4.05) 2(-2.25,-4.05) 3(-1.75,-4.05) 4(-1.25,-4.05) 5(-0.75,-4.05) 6(-0.25,-4.05) 7(0.25,-4.05) 8(0.75,-4.05) 9(1.25,-4.05) 10(1.75,-4.05) 11(2.25,-4.05) 12(2.75,-4.05) 25(2.75,4.05) 26(2.25,4.05) 27(1.75,4.05) 28(1.25,4.05) 29(0.75,4.05) 30(0.25,4.05) 31(-0.25,4.05) 32(-0.75,4.05) 33(-1.25,4.05) 34(-1.75,4.05) 35(-2.25,4.05) 36(-2.75,4.05)
  oval 1.8x0.3 smd: 13(4.05,-2.75) 14(4.05,-2.25) 15(4.05,-1.75) 16(4.05,-1.25) 17(4.05,-0.75) 18(4.05,-0.25) 19(4.05,0.25) 20(4.05,0.75) 21(4.05,1.25) 22(4.05,1.75) 23(4.05,2.25) 24(4.05,2.75) 37(-4.05,2.75) 38(-4.05,2.25) 39(-4.05,1.75) 40(-4.05,1.25) 41(-4.05,0.75) 42(-4.05,0.25) 43(-4.05,-0.25) 44(-4.05,-0.75) 45(-4.05,-1.25) 46(-4.05,-1.75) 47(-4.05,-2.25) 48(-4.05,-2.75)
  silkscreen extent -3.57,-4.18 2.75,2.75, body extent -4.5,-4.5 4.5,4.5, height 1.6
TYCO-282834-4 [mm] "Terminal Block (2.54mm)"
  oval 1.8x2.2 hole 1.1: 1(-3.81,0) 2(-1.27,0) 3(1.27,0) 4(3.81,0)
  silkscreen extent -5.08,-3.25 5.08,3.25, body extent -5.32,-3.25 5.3,3.25, height 10
USB4085-GF-A [mm] "USB-C Connector"
  oval 0.8x0.62 hole 0.4: A1(2.18,2.975) A4(2.18,2.125) A5(2.18,1.275) A6(2.18,0.425) A7(2.18,-0.425) A8(2.18,-1.275) A9(2.18,-2.125) A12(2.18,-2.975) B1(0.83,-2.975) B4(0.83,-2.125) B5(0.83,-1.275) B6(0.83,-0.425) B7(0.83,0.425) B8(0.83,1.275) B9(0.83,2.125) B12(0.83,2.975)
  oval 1.8x1 hole 0.6 slot 1.4 at 0 deg: SH(-2.18,4.325) SH(-2.18,-4.325)
  oval 2.5x1 hole 0.6 slot 2.1 at 0 deg: SH(1.2,4.325) SH(1.2,-4.325)
  silkscreen extent -3.92,-4.47 2.88,4.57, body extent -6.41,-4.52 2.76,4.51, height 3.46
VR3216-1206 [mm] "Varistor 1206"
  rect 1.02x1.65 smd: 1(-1.52,0) 2(1.52,0)
  Top Layer keep-out region: -0.8,-1 0.8,-1 0.8,1 -0.8,1
  silkscreen extent -2.3,-1.1 2.3,1.1, body extent -1.6,-0.85 1.6,0.85, height 1.86

## Part data
BR1: "Bridge Rectifier Diode, Single Phase, 100 V, 800 mA, SOIC, 1.1 V, 4 Pins"
C1 C5: library part Cap_CCNP_0805, "Capacitor non-polar SMT 0805"
C2 C6 C13: library part Cap, "Capacitor"
C3 C4: library part Cap-RB5/13x21MM
C7 C8 C9 C10 C11 C14 C15 C16 C17 C18 C19 C20: library part Cap_CCNP_0603, "Capacitor non-polar SMT 0603"
C24 C25: library part Cap_CC_0805, "Capacitor SMT 0805"
D1 D2: "Surface Mount Zener Diode, 12-13 V, -65 to 150 degC, 2-Pin SMD (SOD-123), RoHS, Tape and Reel"
D3 D4 D7 D8 D13 D14 D15 D17: "Dual Series low-leakage switching diodes, 3-Pin SOT-23"
D5: library part DZ23Cxx, "Dual silicon planar Zener diodes"
D6: library part AZ23Cxx, "Dual silicon planar Zener diodes"
D9 D11: library part LED_3MM_RED, "3mm Red LED"
D10 D12: library part LED_3MM_GREEN, "3mm Green LED"
D16: "Dual  Series Schottky Diodes, SOT23"
E1: library part "Rotary Encoder - PEC12R-4217F", "Rotary Encoder Bourns / 17.5 mm shaft"
ER1 ER2 Gnd1 T1 T2 T3 TP_+3V3 TP_+V TP_-5V TP_-V TP_AC_REF TP_D1 TP_D2 TP_H1 TP_H2 TP_NTC1 TP_NTC2 TP_OC TP_PGND TP_SCL TP_SDA TP_TC1 TP_TC2 TP_Vpp: library part TP, "Test Point"
F1: library part FUSE_CLIP_5x20, "5x20mm fuse clip PCB Mount"
J1: library part JST-B4B-XH-A
J2: library part JST-B3B-XH-A
NT1: library part NetTie2
OLED1: library part OLED_Display_128x64_2.4inch, "OLED Display 128x64 pixels,  / 2.4\""
P1: "2.54mm Terminal Block"
P2 P3: "Wire-To-Board Connector, With Polarizing Peg, 3 mm, 6 Contacts, Header, Micro-Fit 3.0 43045 Series"
P6: library part SWD2X5_JIG
Q1 Q2 Q7 Q8: "P-Channel Power MOSFET, 11 A, 40 V, RDS(ON) = 0.013 Ω @ VGS = -10   VRDS(ON) = 0.017 Ω @ VGS =   -4.5 VC"
Q3 Q4: "General Purpose Transistor, PNP Silicon, 3-Pin SOT-23, Pb-Free, Tape and Reel"
Q5 Q6: "General Purpose Transistor, NPN Silicon, 3-Pin SOT-23, Pb-Free, Tape and Reel"
Q9 Q10: "N-Channel Power MOSFET, 11 A, 40 V. RDS(ON)  = 13 mΩ @ VGS = 4.5 V"
R1 R2 R3 R4 R5 R6 R7 R8 R9 R10 R11 R12 R13 R14 R15 R16 R17 R18 R19 R20 R21 R22 R23 R24 R27 R28 R29 R30 R31 R32 R33 R34 R35 R36 R37 R38 R39 R40 R41 R42 R43 R44 R45 R46 R47 R48 R49 R50 R51 R52 R53 R54 R55 R56 R57 R58 R59 R60 R61 R62 R63 R64 R65 R66 R67 R68 R69 R70 R71: library part Res_CR0603, "Resistor SMT 0603"
R25 R26: "Current Sense Resistor, 0.05 ohm, OAR Series, 3 W, Metal Strip, Radial Leaded, ± 1%"
RV1: "V33MLA1206NH - TVS Varistor, 26 V, 33 V, MLA Series, 75 V, 1206 [3216 Metric], Multilayer Varistor (MLV)"
S1 S2 S3: library part SW_PB-B3F1052, "Switch miniature push-button"
SC1 SC2 SC3: library part "Switch-Cap - B32-2010", "Switch Cap"
SP1 SP2 SP3 SP4: library part Spacer-6mm
U1: "IC REG LINEAR +3V3 1A TO252-3"
U2: "IC REG LINEAR -5V 100MA SOIC-8"
U3 U4: "Dual Precision,Rail-to-Rail Input and Output, 4.5-24V, Zero-Drift OperationalAmplifier"
U5: "Kinetis K20: 50MHz Cortex-M4 Performance MCU, 160KB Flash, 16KB SRAM, Full-Speed USB, 48-LQFP"
U6: "Full/Low Speed 5 kV USB Digital Isolator"
U8: "IC DUAL DIFF COMPARATOR 8-SOIC"
U10: library part LM4040BIM3-2.5/NOPB, "IC 3.0V VREF SHUNT 0.2% SOT23-3"
USB1: "USB-C, USB 2.0 Receptacle Connector 16 Position Through Hole, Right Angle"
Y1: library part "Crystal 16MHz", "Crystal SMD 3.2 x 2.5 x 0.7 mm"
Z1: "Ultra low capacitance quadruple rail-to-rail ESD protection"

## Via types
v1: diameter 0.5, hole 0.3, Top Layer to Bottom Layer, tented both sides, 337 vias
v2: diameter 0.6, hole 0.4, Top Layer to Bottom Layer, tented both sides, 63 vias

## Nets (pads, with @x,y where several pads share a name; then routed paths per layer and width w, separated by ;. In a path a pad name is that pad's centre, name@x,y a point inside that pad or via, vN(x,y) a via of type N, cw(c..) or ccw(c..) an arc to the next point about the centre after c; other vN are vias at no path point)
5V_USB: C7.2 U6.1 USB1.A4 USB1.A9 USB1.B4 USB1.B9 Z1.5 | length 25.1
  Top Layer w0.3: Z1.5@8.998,-10.795 v1(9.887,-10.795)
  Top Layer w0.508: U6.1@6.532,-16.256 6.55,-16.274 9.779,-16.274 10.559,-16.274 10.541,-16.256 v1(9.779,-16.256) ; USB1.A9@13.62,-8.675 USB1.B4@14.97,-8.675
  Bottom Layer w0.508: v1(9.779,-16.256) 9.779,-15.113 9.887,-15.005 9.887,-13.1 ; v1(9.887,-10.795) 9.887,-13.1 ; USB1.A9@13.62,-8.675 USB1.B4@14.97,-8.675 ; USB1.B9@14.97,-12.925 USB1.A4@13.62,-12.925 10.062,-12.925 9.887,-13.1 ; USB1.B9@14.991,-12.904 15.709,-12.904 16.167,-12.446 16.167,-9.144 15.677,-8.654 USB1.B4@14.991,-8.654
+3V3: C2.2 C8.1 C9.1 C13.2 C14.2 C15.2 C16.2 C19.1 C20.2 D3.2 D4.2 D7.2 D8.2 D13.2 D14.2 D15.2 D16.2 D17.2 J1.1 OLED1.6 P6.1 Q3.2 Q4.2 R3.1 R4.1 R13.2 R14.2 R37.2 R38.2 R40.2 R44.2 R45.2 R46.2 R48.1 R51.2 R53.2 R54.2 R55.2 R59.2 R64.2 R67.2 R68.2 R71.2 TP_+3V3.1 U1.4 U3.8 U4.8 U5.1 U5.5 U5.6 U5.9 U5.16 U5.22 U6.12 U6.13 U6.14 U6.16 U8.8 | length 311
  Top Layer w0.254: U5.6@-12.11,-12.332 -10.944,-12.332 -10.795,-12.183 -10.795,-12.065 -10.594,-11.864 C13.2@-9.359,-11.864
  Top Layer w0.3: R46.2@-99.834,-24.511 R44.2@-99.834,-19.431 -92.444,-19.431 R45.2@-92.317,-19.558 -92.317,-17.768 -91.581,-17.032 -87.249,-17.032 ; R51.2@-87.35,-22 R53.2@-87.35,-19.5 -87.35,-17.133 -87.249,-17.032 ; OLED1.6@-83.5,-17.032 -87.249,-17.032 ; D7.2@-79.563,-19.47 D7.2@-79.563,-19.195 -79.563,-18.222 -79.502,-18.161 ; Q3.2@-71.011,-29.149 -70.973,-29.186 -68.477,-29.186 v1(-68.453,-29.21) ; D3.2@-64.704,-22.751 D14.2@-64.704,-19.068 -64.648,-19.012 -64.648,-17.582 R13.2@-64.593,-17.526 ; R67.2@-61.247,-27.311 -61.341,-27.404 -60.706,-28.039 v1(-60.706,-28.067) ; U8.8@-58.014,-28.829 -55.461,-28.829 -54.572,-29.718 R68.2@-54.572,-31 ; -38.608,0.381 -38.608,-2.032 -37.145,-3.495 D13.2@-37.145,-5.098 ; v1(-32.678,-29.249) Q4.2@-31.349,-29.249 ; Q4.2@-31.349,-29.149 -31.249,-29.249 -30.288,-29.249 R4.1@-30.188,-29.349 ; D17.2@-31.049,-5.098 -31.049,-2.652 J1.1@-29.397,-1 -29.349,-0.952 -29.349,0.381 ; C14.2@-17.958,-5.387 -18.161,-5.59 -18.161,-6.477 -17.91,-6.728 U5.22@-17.91,-8.032 -17.91,-9.079 -17.538,-9.451 v1(-16.776,-9.451) ; -15.277,-9.73 -14.91,-9.363 U5.16@-14.91,-8.032 -14.91,-5.68 -14.375,-5.145 -12.815,-5.145 R48.1@-12.815,-5.18 ; v1@-13.537,-10.832 U5.9@-12.11,-10.832 C15.2@-9.652,-10.832 ; U5.5@-12.11,-12.832 -10.673,-12.832 -10.112,-12.271 -9.692,-12.271 C13.2@-9.359,-11.938 ; U5.1@-12.06,-14.832 -11.268,-14.832 v1(-10.324,-15.776) -10.295,-15.776 -9.815,-16.256 C16.2@-8.597,-16.256 -8.547,-16.256 -8.197,-16.606 -8.197,-17.076 -7.747,-17.526 -6.096,-17.526 ; R37.2@-11.315,-19.558 R38.2@-11.315,-20.701 -11.122,-20.894 -6.096,-20.894 ; C15.2@-9.506,-10.309 C15.2@-8.959,-10.309 ; C13.2@-9.359,-11.864 C15.2@-9.359,-10.541 ; D16.2@-4.554,-22.667 -5.781,-22.667 -6.096,-22.352 -6.096,-20.894 ; C20.2@-4.445,-13.12 -4.445,-12.453 ; C20.2@-4.191,-13.716 U6.14@-2.518,-13.716 -1.143,-13.716 -0.635,-14.224 -0.635,-15.354 U6.16@-1.537,-16.256 ; U6.12@-3.168,-11.176 -3.225,-11.233 -3.867,-11.233 -4.445,-11.811 -4.445,-12.453 ; U6.13@-2.468,-12.446 U6.13@-2.518,-12.446 -4.438,-12.446 -4.445,-12.453 ; U6.16@-1.652,-16.28 -2.444,-16.28 -2.468,-16.256 U6.16@-2.518,-16.256 -2.958,-16.256 -3.097,-16.395 -3.097,-16.788 -3.835,-17.526 -6.096,-17.526 ; -6.096,-20.894 -6.096,-17.526
  Top Layer w0.4: R54.2@-80.137,-22.11 -80.137,-20.044 D7.2@-79.563,-19.47 ; U3.8@-68.809,-19.05 v1(-65.659,-19.05) -65.65,-19.059 -64.713,-19.059 D14.2@-64.704,-19.068 ; v1(-50.8,-19.05) -50.781,-19.069 -50.199,-19.069 -50.099,-18.969 D8.2@-50.099,-18.949 ; R55.2@-50.76,-22.17 -50.76,-20.104 D8.2@-50.186,-19.53 ; v1(-37.275,-19.05) D15.2@-34.826,-19.05 ; D4.2@-34.859,-22.751 D4.2@-34.826,-22.718 -34.826,-19.068 -34.79,-19.031 -34.79,-17.563 R14.2@-34.753,-17.526 R14.2@-34.753,-17.426 ; R71.2@-11.315,-23.876 R64.2@-11.315,-22.987 R40.2@-11.315,-21.844 R38.2@-11.315,-20.894
  Top Layer w0.5: R67.2@-61.247,-27.311 R67.2@-61.226,-27.332 ; C19.1@-58.774,-27.18 -58.674,-27.08 -58.674,-26.543 -58.166,-26.035 v1(-58.166,-19.05) ; C19.1@-58.752,-27.178 -58.569,-27.361 v1(-58.569,-28.086) -58.569,-28.811 -58.552,-28.829 U8.8@-58.014,-28.829 ; -46.21,-3.863 -45.011,-3.863 -40.767,0.381 -38.608,0.381 -29.349,0.381 -24.549,0.381 -22.644,-1.524 -21.806,-1.524 ; P6.1@-21.044,-0.762 -21.806,-1.524 ; v1(-18.173,-4.498) -18.173,-4.052 -19.406,-2.819 R59.2@-21.564,-2.819 -21.564,-1.766 -21.806,-1.524 ; v1(-16.776,-9.451) -15.557,-9.451 -15.277,-9.73 -14.287,-10.721 v1(-13.703,-10.721)
  Top Layer w0.508: OLED1.6@-83.5,-17.032 -80.631,-17.032 -79.502,-18.161 v1(-77.47,-18.161) ; -46.21,-3.863 -50.147,-7.8 U1.4@-50.347,-7.8 -49.966,-8.181 -45.793,-8.181 C2.2@-45.732,-8.242 TP_+3V3.1@-45.732,-11.864
  Top Layer w0.635: U3.8@-69.087,-19.032 C8.1@-69.087,-17.551 ; C9.1@-39.318,-17.297 -39.318,-17.466 -39.332,-17.48 -39.332,-19.032 -39.314,-19.05 U4.8@-38.969,-19.05 v1(-37.275,-19.05)
  Bottom Layer w0.5: v1(-77.47,-18.161) -76.581,-19.05 v1(-65.659,-19.05) v1(-58.166,-19.05) v1(-50.8,-19.05) v1(-37.275,-19.05) ; v1(-68.453,-29.21) -66.929,-29.21 -65.767,-28.048 -41.969,-28.048 -40.574,-29.442 -34.268,-29.442 -34.075,-29.249 v1(-32.678,-29.249) ; v1(-13.703,-10.721) -13.703,-12.457 -10.384,-15.776 v1(-10.324,-15.776)
  Bottom Layer w0.508: -45.732,-18.923 TP_+3V3.1@-45.732,-11.864 TP_+3V3.1@-45.732,-11.797 ; v1(-18.173,-4.498) -16.776,-5.895 v1(-16.776,-9.451)
+9V: BR1.1 C1.2 C3.1 TP_+V.1 U1.3 | length 55.9
  Top Layer w0.5: C3.1@-92.468,-5.641 -92.468,-3.822 -88.519,0.127 -79.674,0.127 BR1.1@-79.654,0.107 ; C3.1@-92.341,-5.768 -81.905,-5.768 -80.328,-4.191 -75.323,-4.191 -68.92,-4.191 -63.049,-10.062 C1.2@-60.718,-10.062 ; TP_+V.1@-60.718,-11.852 C1.2@-60.718,-10.062 ; U1.3@-57.627,-9.958 -60.656,-9.958 C1.2@-60.718,-10.02 C1.2@-60.718,-10.062
-5V: C6.2 C10.1 C11.1 Q5.2 Q6.2 R11.2 R12.2 TP_-5V.1 U2.1 U3.4 U4.4 | length 90.6
  Top Layer w0.508: v1(-78.166,-28.255) Q5.2@-78.166,-31.26 Q5.2@-78.13,-31.223 ; v1(-76.161,-10.238) U2.1@-74.689,-10.238 -74.671,-10.221 -72.83,-10.221 C6.2@-71.935,-9.326 ; C6.2@-71.64,-9.131 -68.785,-9.131 TP_-5V.1@-66.052,-11.864 ; v1(-44.97,-24.564) -43.898,-24.564 C11.1@-43.847,-24.615 ; Q6.2@-38.433,-31.278 -38.433,-29.818 v1(-38.433,-28.273)
  Top Layer w0.635: v1(-74.891,-24.615) -73.687,-24.615 C10.1@-73.583,-24.511 U3.4@-73.583,-22.886 ; C11.1@-43.847,-24.615 C11.1@-43.743,-24.511 -43.743,-23.216 ; R12.2@-38.215,-29.818 R12.2@-38.215,-29.718
  Bottom Layer w0.635: v1(-76.161,-10.238) -76.161,-11.559 -78.879,-14.277 -78.879,-24.615 ; v1(-74.891,-24.615) -78.879,-24.615 ; v1@-44.958,-24.564 -44.958,-26.922 ; v1@-38.433,-28.321 -40.095,-28.321 -41.494,-26.922 -44.958,-26.922 ; -78.879,-24.615 -78.879,-27.542 v1(-78.166,-28.255) -77.084,-29.337 -69.977,-29.337 -67.562,-26.922 -44.958,-26.922
-9V: BR1.2 C4.2 C5.2 TP_-V.1 U2.2 U2.3 U2.6 U2.7 | length 70.4
  Top Layer w0.5: C5.2@-82.562,-8.562 -88.658,-8.562 -89.674,-7.546 -105.803,-7.546 C4.2@-107.708,-5.641 -97.675,-5.641 -90.104,1.93 -77.546,1.93 -76.708,1.092 -76.708,-1.219 -77.882,-2.393 BR1.2@-79.654,-2.393 ; C5.2@-82.349,-8.562 C5.2@-82.562,-8.349 -82.349,-8.349 -80.908,-8.349 ; -73.291,-11.864 TP_-V.1@-71.386,-11.864
AC24a: P1.1 P1.2 Q7.5 Q7.6 Q7.7 Q7.8 Q10.5 Q10.6 Q10.7 Q10.8 R20.1 R28.2 RV1.2 | length 65.4
  Top Layer w0.3: v1(-1.867,-37.846) R20.1@-1.867,-36.707 ; R28.2@-1.866,-42.725 v1(-0.925,-42.725)
  Top Layer w0.6: Q10.8@-10.376,-42.828 -10.376,-40.529 ; -10.376,-38.751 Q7.5@-10.376,-36.452 ; Q10.7@-9.106,-42.828 -9.106,-40.529 ; -9.106,-38.751 -9.106,-38.735 Q7.6@-9.106,-36.452 ; Q10.6@-7.836,-42.828 -7.836,-40.529 ; -7.836,-38.751 Q7.7@-7.836,-36.452 ; Q10.5@-6.566,-42.828 -6.566,-40.529 ; -6.566,-38.751 Q7.8@-6.566,-36.452
  Bottom Layer w0.3: v1(-1.867,-37.846) -5.652,-37.846 v2(-7.303,-39.497) -4.075,-42.725 v1(-0.925,-42.725)
  Bottom Layer w2.54: P1.1@-22.098,-47.879 -22.098,-45.455 -21.07,-44.427 -19.558,-44.427 ; P1.2@-19.558,-47.879 -19.558,-44.755
  Bottom Layer w3: -21.717,-44.427 -14.752,-44.427 ; -19.558,-44.427 -12.593,-44.427 -9.843,-41.677 v2(-9.843,-40.259) v2(-9.843,-39.497) v2(-8.573,-39.497) v2(-7.303,-39.497)
  other v2: -8.573,-40.259 -7.303,-40.259 -9.843,-38.735 -8.573,-38.735 -7.303,-38.735
AC24b: F1.2 F1.2a Q8.5 Q8.6 Q8.7 Q8.8 Q9.5 Q9.6 Q9.7 Q9.8 R19.1 R27.2 RV1.1 | length 52.6
  Top Layer w0.3: v1(-4.84,-36.707) R19.1@-3.899,-36.707 ; v1(-3.899,-41.656) R27.2@-3.899,-42.7 R27.2@-3.799,-42.7 ; R19.1@-3.599,-36.753 R19.1@-3.599,-36.653
  Top Layer w0.6: 0.8,-40.64 Q9.8@0.8,-42.028 ; 0.8,-38.735 Q8.5@0.8,-36.452 ; Q9.7@2.07,-42.828 2.07,-40.64 ; 2.07,-38.735 Q8.6@2.07,-36.452 ; Q9.6@3.34,-42.828 3.34,-40.64 ; 3.34,-38.735 Q8.7@3.34,-36.452 ; Q9.5@4.61,-42.828 4.61,-40.529 ; 4.61,-38.751 Q8.8@4.61,-36.452 ; Q9.8@0.8,-42.028 Q9.8@0.8,-42.828 Q9.8@0.8,-42.028
  Bottom Layer w0.3: v1(-4.84,-36.707) -1.609,-36.707 v2(1.181,-39.497) -0.978,-41.656 v1(-3.899,-41.656)
  Bottom Layer w3: v2(1.181,-39.497) v2@3.544,-39.497 ; v2(2.451,-38.735) 8.875,-32.311 F1.2a@9.64,-32.311 ; F1.2a@9.64,-31.827 F1.2@9.64,-25.58
  other v2: 1.181,-40.259 2.451,-40.259 3.721,-40.259 2.451,-39.497 3.721,-39.497 1.181,-38.735 3.721,-38.735
AC_REF: D16.3 R58.2 TP_AC_REF.1 U5.13 | length 36
  Top Layer w0.3: U5.13@-13.41,-8.032 -13.41,-7.282 -12.986,-6.858 v1(-12.7,-6.858) ; D16.3@-2.367,-21.78 D16.3@-2.304,-21.717 TP_AC_REF.1@1.27,-21.717 1.276,-21.723 3.042,-21.723 R58.2@3.048,-21.729
  Bottom Layer w0.3: v1(-12.7,-6.858) -5.842,-6.858 -5.334,-6.35 0.127,-6.35 1.27,-7.493 TP_AC_REF.1@1.27,-21.717
CH1_ACT: Q4.3 R10.2 R49.2 | length 24.4
  Top Layer w0.3: R49.2@-36.195,-51.828 -36.195,-49.276 v1(-35.687,-48.768) ; v1(-35.687,-44.815) -35.687,-36.576 -34.544,-35.433 -34.544,-32.484 -33.599,-31.539 Q4.3@-33.599,-30.099 -33.874,-30.099 -34.024,-29.949 -34.024,-29.779 -34.2,-29.603 R10.2@-34.925,-29.603
  Bottom Layer w0.3: v1(-35.687,-48.768) v1(-35.687,-44.815)
CH1_BTN: R40.1 S3.2 U5.45 | length 47.6
  Top Layer w0.3: S3.2@-34.25,-49.25 -34.006,-49.25 -33.651,-48.895 -31.398,-48.895 -29.469,-46.966 -27.219,-46.966 -24.154,-43.901 -24.154,-29.996 -16.637,-22.479 ; -16.564,-22.406 v1(-15.748,-21.59) -14.224,-20.066 -14.224,-18.542 -14.904,-17.862 -14.904,-16.188 U5.45@-14.91,-16.182 ; v1(-13.462,-21.844) R40.1@-12.815,-21.844
  Bottom Layer w0.3: v1(-15.748,-21.59) -15.621,-21.59 -15.367,-21.844 v1(-13.462,-21.844) -13.662,-21.844 -13.716,-21.898
CH1_DRV: R8.2 TP_D1.1 U5.36 | length 24.1
  Top Layer w0.3: R8.2@-30.962,-32.766 -29.819,-32.766 -28.206,-31.153 TP_D1.1@-28.206,-28.882 ; U5.36@-20.21,-14.832 -19.812,-14.832 -19.685,-14.832 -19.812,-14.959 v1(-19.812,-17.926)
  Bottom Layer w0.3: TP_D1.1@-28.206,-28.882 -21.209,-21.885 -21.209,-18.796 -20.339,-17.926 v1(-19.812,-17.926)
CH1_Htr: C25.1 P3.4 Q2.5 Q2.6 Q2.7 Q2.8 TP_H1.1 | length 1.7
  Top Layer w1.27: P3.4@-53.5,-37.103 -51.778,-37.103
CH1_ID: P3.3 R71.1 U5.35 | length 81.2
  Top Layer w0.3: P3.3@-59.515,-40.108 -57.277,-42.346 -57.277,-44.958 -55.591,-46.644 -31.658,-46.644 -30.226,-45.212 -27.94,-45.212 -25.908,-43.18 -25.908,-28.702 v1(-18.923,-21.717) -20.066,-20.574 -20.955,-20.574 -21.717,-19.812 -21.717,-14.508 -21.541,-14.332 U5.35@-20.21,-14.332 ; v1(-13.462,-24.13) R71.1@-12.815,-24.13
  Bottom Layer w0.3: v1(-18.923,-21.717) -16.51,-24.13 v1(-13.462,-24.13)